# EAGLE board blinkenrocket_cr2032_v2 (EAGLE 6.6.0)
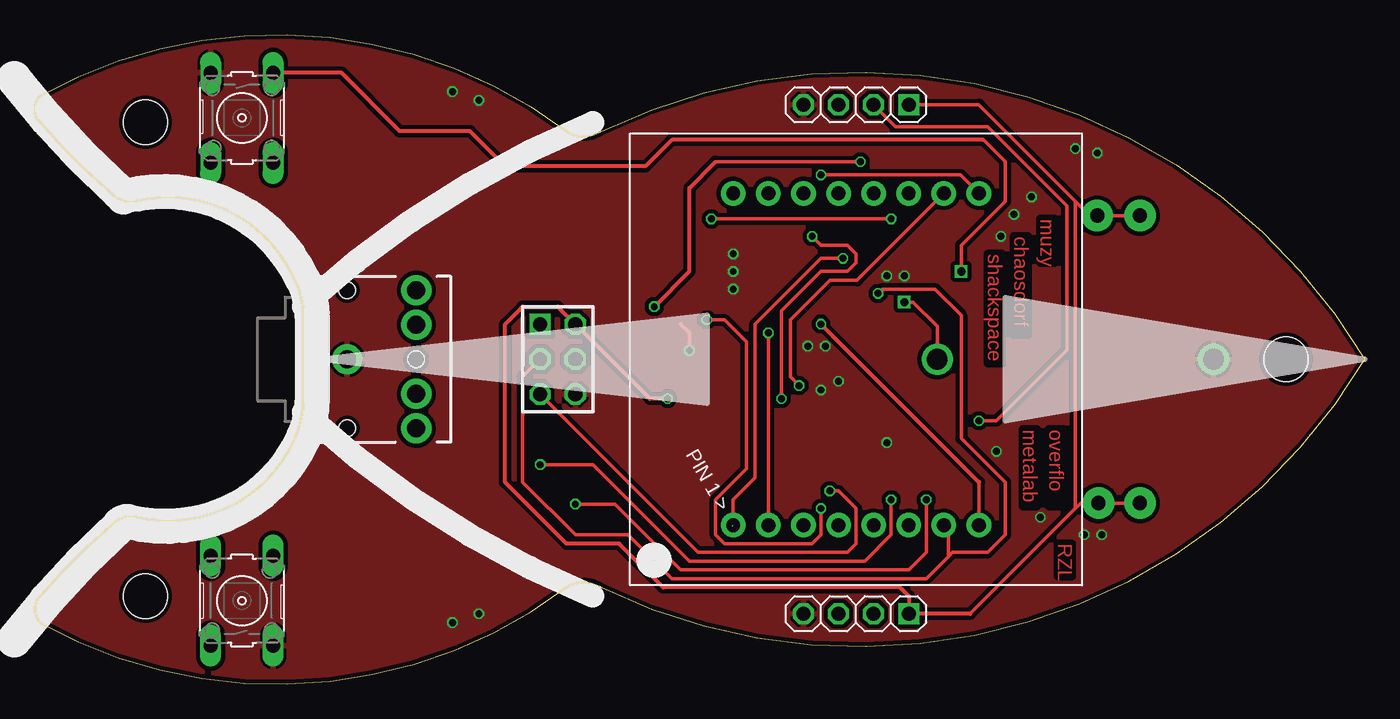
[diagram p0: board, top side]
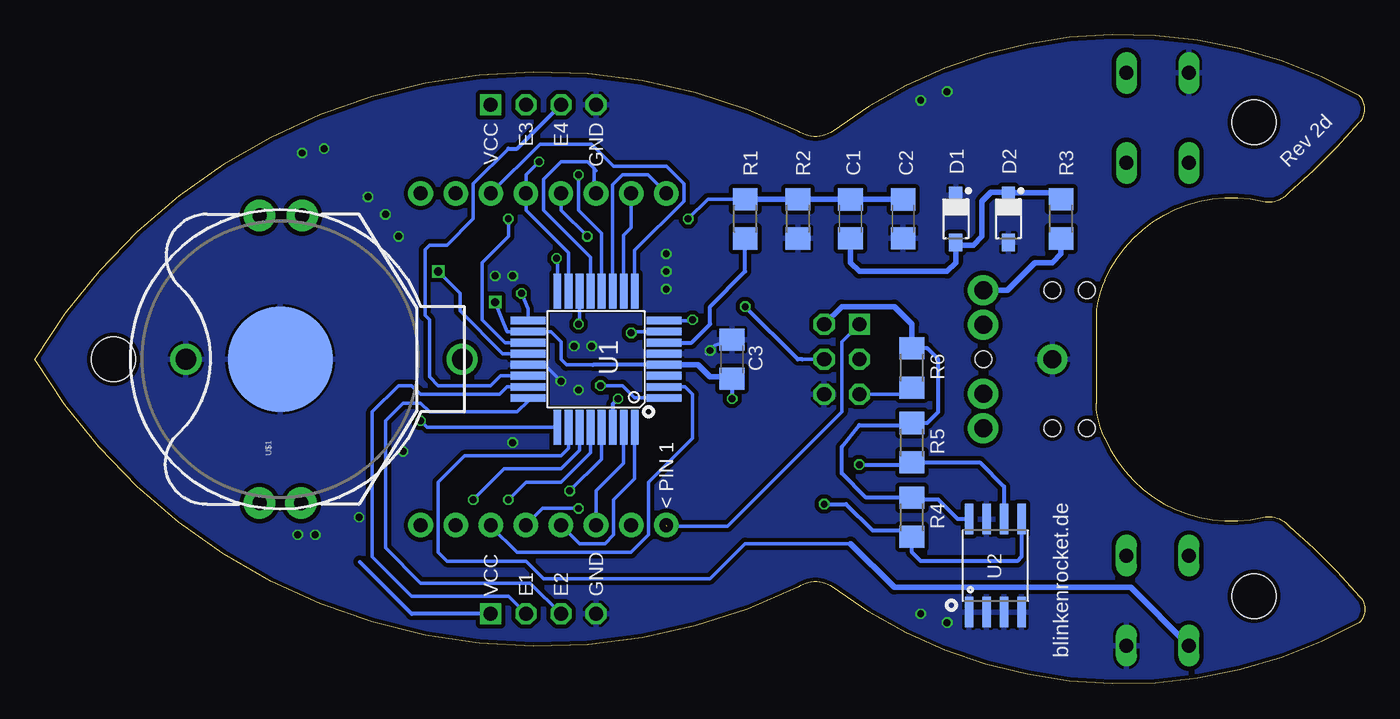
[diagram p1: board, bottom side, seen from below]

Size 96.29 x 46.98 mm. Coordinates in mm from the lower left corner, seen from the top.
Outline: 18.82,29.21 arc80 7.39,34.92 arc-60 5.48,35.56 arc-10 0.4,40.64 arc-92 0.4,42.54 arc-66 38.5,40 arc70 41.04,40 arc-85 96.29,23.49 arc-85 41.04,6.98 arc70 38.5,6.98 arc-66 0.4,4.44 arc-92 0.4,6.35 arc-10 5.48,11.43 arc-60 7.39,12.06 arc80 18.82,17.78 arc25 19.45,20.32 19.45,26.67 arc25 18.82,29.21
Copper layers (1*16): Top 0.018mm / dielectric 1.55mm / Bottom 0.018mm
Design rules "Multi-CB_2L_125Êm-Tracks_OL35Êm *": minimum track width 0.125mm, minimum drill 0.2mm, track to track 0.125mm, track to pad 0.125mm, pad to pad 0.125mm, via to via 0.125mm, smd to smd 0mil, copper to edge 0.2mm, drill to drill 0.2mm, minimum pad ring 0.125mm, minimum via ring 0.125mm, stop-mask expansion 2mil, vias tented up to drill 5mm, thermal gap 0.2mm
Holes 3.2 mm at 90.57,23.49 8.02,40.64 8.02,6.35

## Footprints (pad centres in the part's own frame; a part is rotated, then mirrored left to right if it is on the bottom)
C1206 = smd 1.6 x 1.8: 1 -1.4,0; 2 1.4,0
SOD3718X135N = smd 1.27 x 0.965: A 1.7,0; K -1.7,0
AVR-ISP-6 = drill 1.016 square: 1 -2.54,-1.27 | drill 1.016 octagon: 2 -2.54,1.27; 3 0,-1.27; 4 0,1.27; 5 2.54,-1.27; 6 2.54,1.27
AUDIO-JACK = drill 1.3 pad 2.184: RING 5,5; RSH 5,2.5; SLEEVE 0,0; TIP 5,-5; TSH 5,-2.5 | hole 1.2: 0,5; -2.5,5; -2.5,-5; 0,-5; 5,0
1X04-S = drill 1.016 square: 1 -3.81,0 | drill 1.016 octagon: 2 -1.27,0; 3 1.27,0; 4 3.81,0
SEGMENT_BL-M12A883 = drill 1 pad 1.778: 1 -8.89,-12; 2 -6.35,-12; 3 -3.81,-12; 4 -1.27,-12; 5 1.27,-12; 6 3.81,-12; 7 6.35,-12; 8 8.89,-12; 9 8.89,12; 10 6.35,12; 11 3.81,12; 12 1.27,12; 13 -1.27,12; 14 -3.81,12; 15 -6.35,12; 16 -8.89,12
R1206 = smd 1.6 x 1.803: 1 -1.422,0; 2 1.422,0
B3F-10XX = drill 1.016 long: 1 -3.251,2.261; 2 3.251,2.261; 3 -3.251,-2.261; 4 3.251,-2.261
SO08-EIAJ = smd 0.61 x 2.21: 1 -1.905,-3.378; 2 -0.635,-3.378; 3 0.635,-3.378; 4 1.905,-3.378; 5 1.905,3.353; 6 0.635,3.353; 7 -0.635,3.353; 8 -1.905,3.353
BAT_20MM_TH = smd 7.62 x 7.62: GND 0,0 | drill 1.016 pad 2.286: VCC1 -10.4,1.5; VCC2 -10.4,-1.5; VCC3 10.4,1.5; VCC4 10.4,-1.6
TQFP32-08 = smd 2.54 x 0.559: 1 -4.928,2.8; 2 -4.928,2; 3 -4.928,1.2; 4 -4.928,0.4; 5 -4.928,-0.4; 6 -4.928,-1.2; 7 -4.928,-2; 8 -4.928,-2.8; 17 4.928,-2.8; 18 4.928,-2; 19 4.928,-1.2; 20 4.928,-0.4; 21 4.928,0.4; 22 4.928,1.2; 23 4.928,2; 24 4.928,2.8 | smd 0.559 x 2.54: 9 -2.8,-4.928; 10 -2,-4.928; 11 -1.2,-4.928; 12 -0.4,-4.928; 13 0.4,-4.928; 14 1.2,-4.928; 15 2,-4.928; 16 2.8,-4.928; 25 2.8,4.928; 26 2,4.928; 27 1.2,4.928; 28 0.4,4.928; 29 -0.4,4.928; 30 -1.2,4.928; 31 -2,4.928; 32 -2.8,4.928
CR2032PAC_ELECTRODRAGON = drill 1.5 pad 2.184: + -10,0; - 10,0

## Placement (x,y rotation side)
C1  10uF  [C1206]  37.23,33.65 90 bottom
C2  0.47uF  [C1206]  33.42,33.65 270 bottom
C3  0.47uF  [C1206]  45.8,23.49 90 bottom
D1  1N4148  [SOD3718X135N]  29.61,33.65 270 bottom
D2  1N4148  [SOD3718X135N]  25.8,33.65 270 bottom
ISP  AVR-ISP-6VERT  [AVR-ISP-6]  37.87,23.49 270 top
JP1  [AUDIO-JACK]  22.63,23.49 0 top
JP3  [1X04-S]  59.46,5.08 180 top
JP4  [1X04-S]  59.46,41.91 180 top
LED2  [SEGMENT_BL-M12A883]  59.46,23.49 0 top
R1  8.2K  [R1206]  44.85,33.65 270 bottom
R2  6.8K  [R1206]  41.04,33.65 90 bottom
R3  16  [R1206]  21.99,33.65 270 bottom
R4  10K  [R1206]  32.79,12.06 270 bottom
R5  10K  [R1206]  32.79,17.46 270 bottom
R6  10K  [R1206]  32.79,22.86 270 bottom
S1  [B3F-10XX]  15.01,6.03 90 top
S2  [B3F-10XX]  15.01,40.95 270 top
U2  EEPROM-I2CEIAJ  [SO08-EIAJ]  26.75,8.57 0 bottom
U$1  LINX-BAT-HLD-001-TH  [BAT_20MM_TH]  78.51,23.49 90 bottom
U$2  U1  [TQFP32-08]  55.65,23.49 180 bottom
U$5  CR2032_ELECTRODRAGON  [CR2032PAC_ELECTRODRAGON]  75.33,23.49 180 bottom

## Library data of the parts
C1-C3 R1-R6 = resistor
D1 D2 = ipc-7351-diode
ISP = avr-7
JP1 = SparkFun-Connectors
JP3 JP4 = pinhead-2
LED2 = adafruit
S1 S2 = switch-omron; MPN: B3F-1000; OC_FARNELL: 176432; OC_NEWARK: 36M3542
U2 = SparkFun-DigitalIC
U$1 = battery
U$2 = avr-muzy
U$5 = rgb_trippies

## Nets
AVR_AUDIO_IN: C1.2 C2.1 R1.1 R2.2 U$2.19
B1: S2.1 U$2.20
B2: S1.1 U$2.26
C1: LED2.13 U$2.30
C2: LED2.3 U$2.31
C3: LED2.4 U$2.32
C4: LED2.10 U$2.1
C5: LED2.6 U$2.2
C6: LED2.11 U$2.9
C7: LED2.15 U$2.10
C8: LED2.16 U$2.11
E1: JP3.2 U$2.23
E2: JP3.3 U$2.24
E3: JP4.2 U$2.25
E4: JP4.3 U$2.22
GND: C2.2 C3.2 D1.K D2.A ISP.6 JP1.SLEEVE JP3.4 JP4.4 R2.1 S1.3 S2.3 U2.1 U2.2 U2.3 U2.4 U2.7 U$1.GND U$2.5 U$2.21 U$5.-
N$1: JP1.RING R3.2
N$3: C1.1 D1.A D2.K R3.1
R1: LED2.9 U$2.12
R2: LED2.14 U$2.13
R3: LED2.8 U$2.14
R4/MOSI: ISP.4 LED2.12 U$2.15
R5/MISO: ISP.1 LED2.1 U$2.16
R6/SCK: ISP.3 LED2.7 U$2.17
R7: LED2.2 U$2.7
R8: LED2.5 U$2.8
RESET: ISP.5 R6.2 U$2.29
SCL: R5.2 U2.6 U$2.28
SDA: R4.2 U2.5 U$2.27
TRIG1: U$2.3
TRIG2: R1.2 U$2.6
VCC: C3.1 ISP.2 JP3.1 JP4.1 R4.1 R5.1 R6.1 U2.8 U$1.VCC1 U$1.VCC2 U$1.VCC3 U$1.VCC4 U$2.4 U$2.18 U$5.+

## Tracks (layer width: path | path; a pad name or v marks a point on that pad's centre or on a via)
AVR_AUDIO_IN  (via drill 0.5)
  Top 0.254: v48.98,33.65 v62,33.65
  Bottom 0.254: R1.1 47.56,35.07 v48.98,33.65 | U$2.19 62.24,24.69 63.9,26.35 63.9,30.48 62,32.38 v62,33.65
  Bottom 0.406: C2.1 C1.2 41.02,35.05 R2.2 R1.1
B1  (via drill 0.6)
  Top 0.254: v67.08,29.84 67.08,31.75 70.25,34.92 70.25,37.78 68.66,39.37
  Top 0.305: 68.66,39.37 46.12,39.37 44.22,37.46 34.06,37.46 31.52,40 26.44,40 22.23,44.2 S2.1
  Bottom 0.254: v67.08,29.84 65.49,28.25 65.49,26.98 62.4,23.89 U$2.20
B2
  Bottom 0.254: U$2.26 57.65,17.05 58.19,16.51 65.17,16.51 67.08,14.6 67.08,9.52 66.44,8.89 60.73,8.89 59.46,7.62 47.39,7.62 44.85,10.16 37.23,10.16
  Bottom 0.406: 37.23,10.16 34.06,6.98 16.96,6.98 S1.1
C1  (via drill 0.5, 0.5 pad 0.25)
  Top 0.254: v54.06,20.63 54.06,26.98 56.92,29.84 58.82,29.84 59.46,30.48 59.46,31.11 58.82,31.75 56.92,31.75 v56.28,32.38
  Bottom 0.254: v56.28,32.38 58.19,34.29 LED2.13
  Bottom 0.305: v54.06,20.63 54.45,20.25 U$2.30
C2
  Bottom 0.254: U$2.31 53.65,15.97 55.65,13.97 LED2.3
C3
  Bottom 0.254: U$2.32 52.85,14.86 54.38,13.33 54.38,10.79 55.01,10.16 56.85,10.16 LED2.4
C4  (via drill 0.5 pad 0.25)
  Top 0.254: v55.33,21.59 54.69,22.22 54.69,26.35 57.55,29.21 59.52,29.21 LED2.10
  Bottom 0.254: v55.33,21.59 53.74,21.59 52.85,20.69 U$2.1
C5
  Bottom 0.254: U$2.2 49.2,21.49 48.66,20.95 48.66,17.78 51.84,14.6 51.84,10.79 53.11,9.52 61.36,9.52 63.27,11.43 LED2.6
C6
  Bottom 0.254: U$2.9 52.85,31.37 49.3,34.92 49.3,36.19 50.57,37.46 54.38,37.46 55.96,39.05 59.71,39.05 LED2.11
C7
  Bottom 0.254: U$2.10 53.65,32.48 53.11,33.02 LED2.15
C8
  Bottom 0.254: U$2.11 54.45,36.12 53.74,36.83 51.9,36.83 LED2.16
E1
  Bottom 0.254: JP3.2 62,6.35 68.98,6.35 71.84,9.2 71.84,19.68 69.93,21.59 68.98,21.59 68.35,20.95 62.63,20.95 62.09,21.49 U$2.23
E2
  Bottom 0.254: JP3.3 60.41,7.3 68.35,7.3 70.89,9.84 70.89,19.05 69.62,20.32 68.35,20.32 67.71,19.68 61.36,19.68 60.57,20.47 U$2.24
E3  (via drill 0.5)
  Top 0.254: JP4.2 62.31,40.32 68.98,40.32 74.7,34.6 74.7,24.13 69.62,19.05 v68.35,19.05
  Bottom 0.254: v68.35,19.05 67.86,18.56 U$2.25
E4
  Bottom 0.254: 62,38.73 64.54,36.19 64.54,33.65 66.44,31.75 67.71,31.75 68.03,31.43 68.03,26.67 67.71,26.35 67.71,22.22 67.08,21.59 63.27,21.59 62.56,22.29 U$2.22
  Bottom 0.305: 62,38.73 61.36,38.73 JP4.3
GND  (via drill 0.5 pad 0.25)
  Top 0.305: v47.39,24.13 47.39,25.4 46.76,26.03
  Bottom 0.254: C3.2 47.03,24.49 v47.39,24.13 | U$2.21 59.37,23.09 v58.19,21.9
  Bottom 0.305: 47.63,23.89 v47.39,24.13
  other vias: 56.92,21.27 72.79,12.06 76.92,38.41 75.33,38.73 69.93,32.38 70.89,33.97 69.62,16.82 61.68,29.52 50.57,29.84 62.95,29.52 72.16,35.24 50.57,28.57 50.57,31.11 61.68,17.46 75.97,10.79 77.24,10.79 55.96,24.44 57.23,24.44 32.15,5.08 30.25,4.44 32.15,42.22 30.25,42.86
  pour Bottom (isolate 0.305): 104.54,57.78 -36.43,60.32 -61.19,-3.18 -3.41,-5.72 93.75,-40.01
  pour Top (isolate 0.305): -49.76,59.05 -35.16,63.5 -26.9,63.5 -24.36,60.96 -16.74,58.42 -13.57,60.32 -8.49,62.23 -6.58,64.13 1.04,63.5 14.37,60.32 18.82,64.13 26.44,60.96 30.88,64.13 49.93,64.77 56.92,68.58 68.35,64.77 76.6,69.21 86.76,71.12 100.1,65.4 104.54,60.96 112.8,59.05 119.78,52.7 132.48,33.02 122.96,23.49 130.58,12.06 123.59,5.08 129.94,-32.39 76.6,-48.26 42.95,-45.09 15.64,-49.53 -1.5,-22.23 -40.87,-9.53
N$1
  Bottom 0.406: 21.51,32.23 R3.2 21.99,31.11 22.63,30.48 23.9,30.48 25.88,28.49 JP1.RING
N$3
  Bottom 0.305: 25.8,35.55 D2.K
  Bottom 0.406: R3.1 22.47,35.55 25.8,35.55 | D2.K 25.81,35.56 27.07,35.56 27.71,34.92 27.71,32.38 28.34,31.75 29.61,31.75 D1.A 29.61,30.48 30.25,29.84 36.6,29.84 37.23,30.48 C1.1
R1  (via drill 0.5 pad 0.25)
  Top 0.254: v56.92,36.83 67.01,36.83 LED2.9
  Bottom 0.254: U$2.12 55.25,32.62 56.92,34.29 v56.92,36.83
R2
  Bottom 0.254: 55.65,37.14 55.81,37.3 | 55.81,37.3 56.28,37.78 58.19,37.78 59.46,36.51 59.46,34.29 56.05,30.88 U$2.13 | LED2.14 55.81,35.65 55.81,37.3
R3  (via drill 0.5 pad 0.25)
  Top 0.254: LED2.8 68.35,14.6
  Top 0.305: 68.35,14.6 v56.92,26.03
  Bottom 0.254: v56.92,26.03 56.85,26.1 U$2.14
R4/MOSI  (via drill 0.5, 0.5 pad 0.25)
  Top 0.254: 49.3,37.78 v59.77,37.78
  Top 0.305: v44.85,27.3 47.39,29.84 47.39,35.87 49.3,37.78
  Bottom 0.254: U$2.15 57.65,31.21 60.73,34.29 LED2.12 60.73,36.83 v59.77,37.78 | 40.72,23.49 ISP.4
  Bottom 0.305: 40.72,23.49 41.04,23.49 v44.85,27.3
R5/MISO  (via drill 0.5 pad 0.25)  (1 unrouted)
  Top 0.254: v58.5,30.79 56.92,30.79 52.15,26.03 52.15,14.92 50.57,13.33 LED2.1
  Bottom 0.254: v58.5,30.79 58.45,30.74 U$2.16 | ISP.1 37.87,24.76 37.87,19.68 46.12,11.43 50.5,11.43
R6/SCK  (via drill 0.5)
  Top 0.254: ISP.3 35.33,22.22 35.33,14.6 39.14,10.79 42.95,10.79 46.12,7.62 64.54,7.62 66.12,9.2 | 66.12,9.2 66.44,9.52 68.98,9.52 70.25,10.79 70.25,14.6 67.08,17.78 67.08,26.67 65.17,28.57 61.36,28.57 v61.04,28.25 | LED2.7 66.12,11.17 66.12,9.2
  Bottom 0.254: U$2.17 60.57,27.15 v61.04,28.25
R7  (via drill 0.5 pad 0.25)
  Top 0.254: LED2.2 v53.11,25.4
  Bottom 0.254: U$2.7 53.01,25.49 v53.11,25.4
R8  (via drill 0.5 pad 0.25)
  Top 0.254: v48.66,26.35 49.93,26.35 51.52,24.76 51.52,15.55 49.3,13.33 49.3,10.79 49.93,10.16 56.28,10.16 56.92,10.79 v56.92,12.7
  Bottom 0.254: U$2.8 48.72,26.29 arc-90 v48.66,26.35 | v56.92,12.7 59.52,12.7 LED2.5
RESET  (via drill 0.5 pad 0.25)
  Top 0.254: v57.55,13.97 58.19,13.97 59.46,12.7 59.46,10.16 58.82,9.52 48.03,9.52 ISP.5
  Bottom 0.254: U$2.29 55.25,16.27 v57.55,13.97 | ISP.5 32.79,20.95 R6.2
SCL  (via drill 0.5 pad 0.25)
  Top 0.254: v62,13.33 62,10.79 60.09,8.89 47.39,8.89 40.41,15.87 v36.6,15.87
  Bottom 0.254: U$2.28 56.05,16.74 58.19,14.6 60.73,14.6 v62,13.33
  Bottom 0.305: U2.6 26.12,14.28 27.87,16.04 R5.2 32.79,15.87 v36.6,15.87
SDA  (via drill 0.5 pad 0.25)
  Top 0.254: v64.54,13.33 64.54,9.52 63.27,8.25 46.76,8.25 41.99,13.01 v39.14,13.01
  Bottom 0.254: U$2.27 56.85,16.89 58.19,15.55 62.31,15.55 v64.54,13.33 | 38.82,13.01 v39.14,13.01
  Bottom 0.305: U2.5 24.85,9.2 25.17,8.89 32.15,8.89 32.79,9.52 R4.2 32.79,11.11 35.64,11.11 37.55,13.01 38.82,13.01
TRIG2
  Bottom 0.305: U$2.6 48.73,24.69 47.39,26.03 47.39,27.3 44.85,29.84 R1.2
VCC  (via drill 0.5 pad 0.25, 0.6)
  Top 0.254: JP4.1 68.35,41.91 75.33,34.92 | 75.33,34.92 75.33,12.7 | 75.33,12.7 67.71,5.08 | U$1.VCC3 U$1.VCC4 76.36,33.89 75.33,34.92 | U$1.VCC1 U$1.VCC2 75.73,13.09 75.33,12.7 | v62.95,27.62 63.58,27.62 65.33,25.87 U$5.+
  Top 0.305: v45.8,20.63 44.53,20.63 ISP.2 37.87,27.3 35.33,27.3 34.06,26.03 34.06,14.6 38.5,10.16 42.31,10.16 45.49,6.98 62.63,6.98 63.27,6.35 JP3.1 67.71,5.08
  Bottom 0.254: 55.88,23.09 57.79,23.09 58.19,23.49 58.19,24.76 58.92,25.49 U$2.18 62.09,25.49 v62.95,27.62
  Bottom 0.305: U$2.4 55.88,23.09 | 72.75,8.84 68.98,5.08 JP3.1 | C3.1 v45.8,20.63 | R6.1 31.67,24.28 30.88,23.49 30.88,19.68 31.68,18.88 R5.1 32.94,18.73 36.6,18.73 37.87,17.14 37.87,15.24 36.11,13.48 R4.1 32.63,13.33 30.88,13.33 29.47,11.92 U2.8
  Bottom 0.406: ISP.2 37.87,27.3 34.06,27.3 32.79,26.03 R6.1 | U$2.4 48.26,23.09 47.39,22.22 45.93,22.22 C3.1

## Text on the board
Top: muzy | chaosdorf | shackspace | metalab | overflo | RZL
tNames: PIN 1 >
bNames: Rev 2d | GND | E4 | E3 | VCC | < PIN 1 | GND | E2 | E1 | VCC | blinkenrocket.de